# Altium PCB Flyback_SMPS.PcbDoc
Units mil, origin at the board's own origin, x right, y up, seen from the top; angles counter-clockwise.
Board outline 3149.61 x 2362.2 mil, 2 copper layers (Top Layer, Bottom Layer), stack 63 mil thick; 32 components, 20 nets, 87 pads, 17 vias.
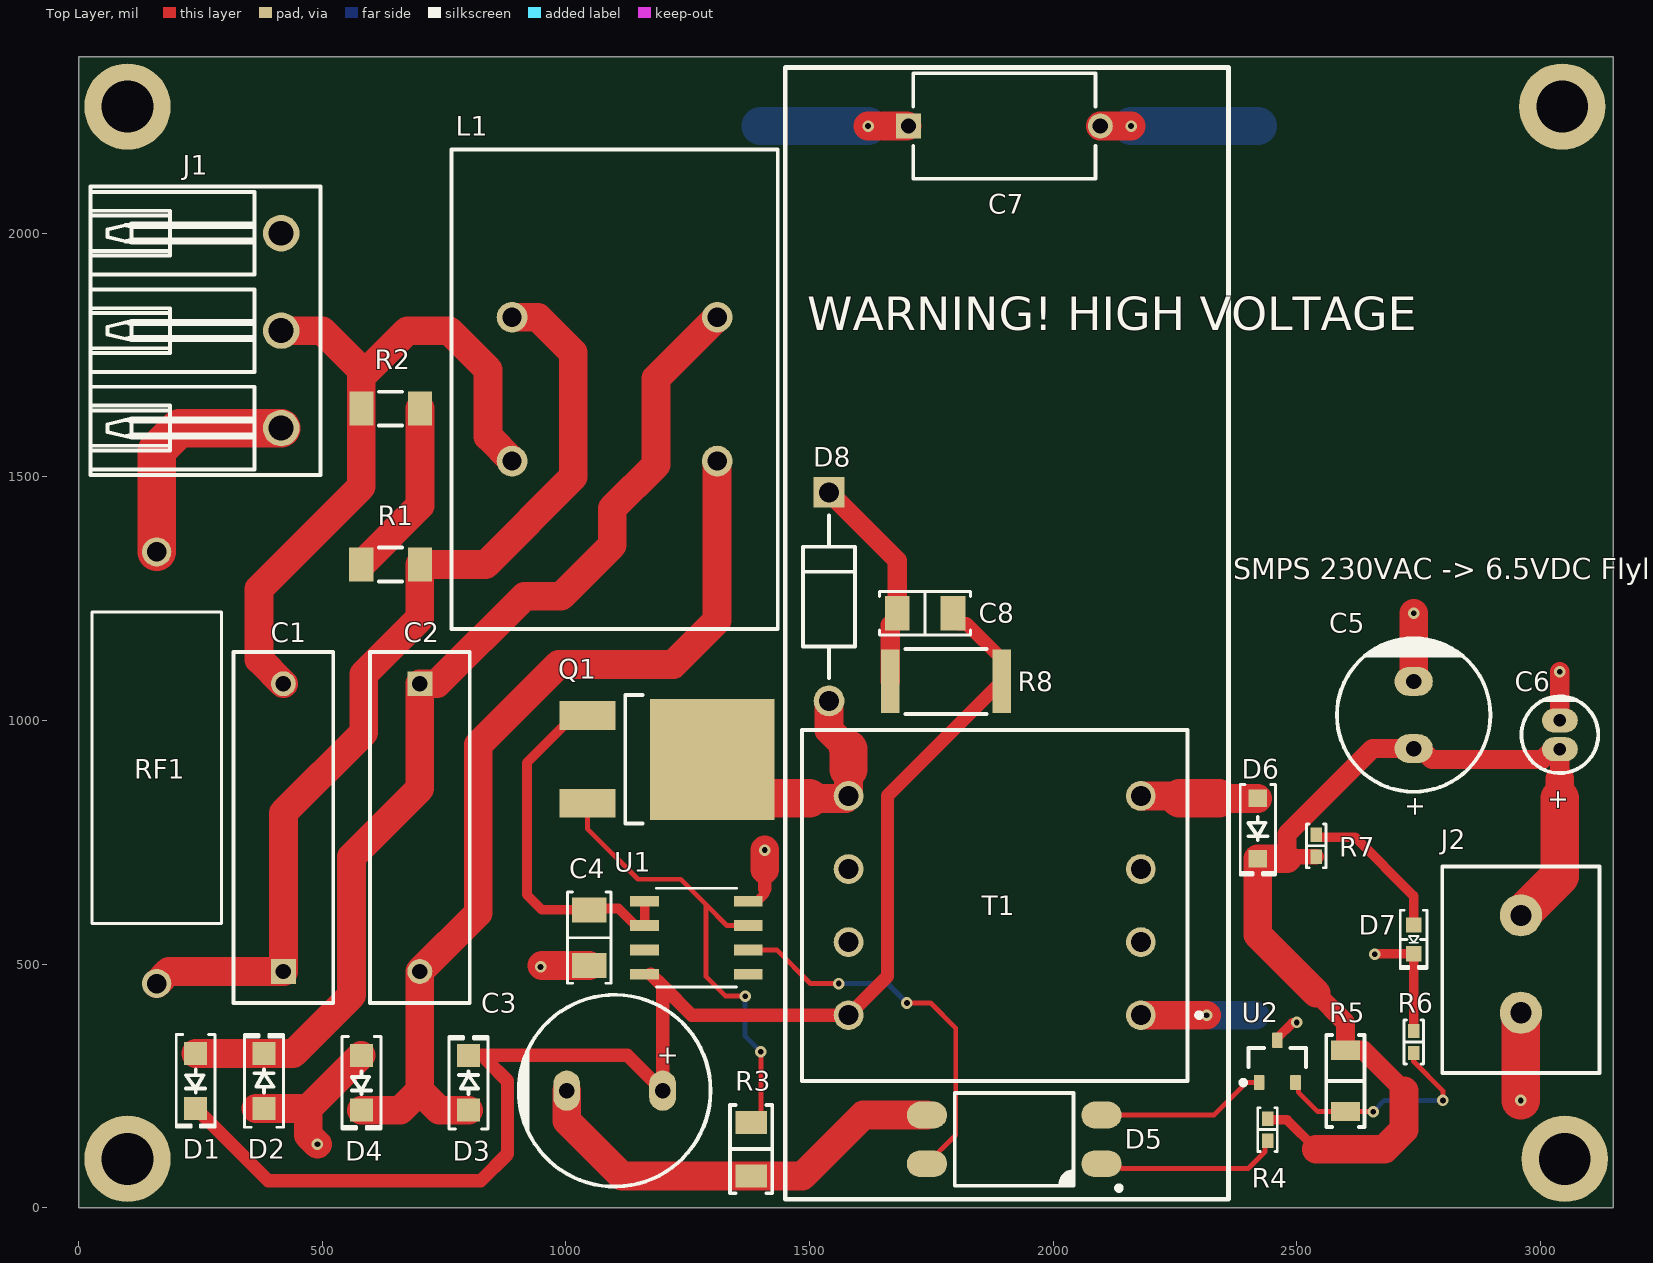
[diagram p0: Top Layer view]
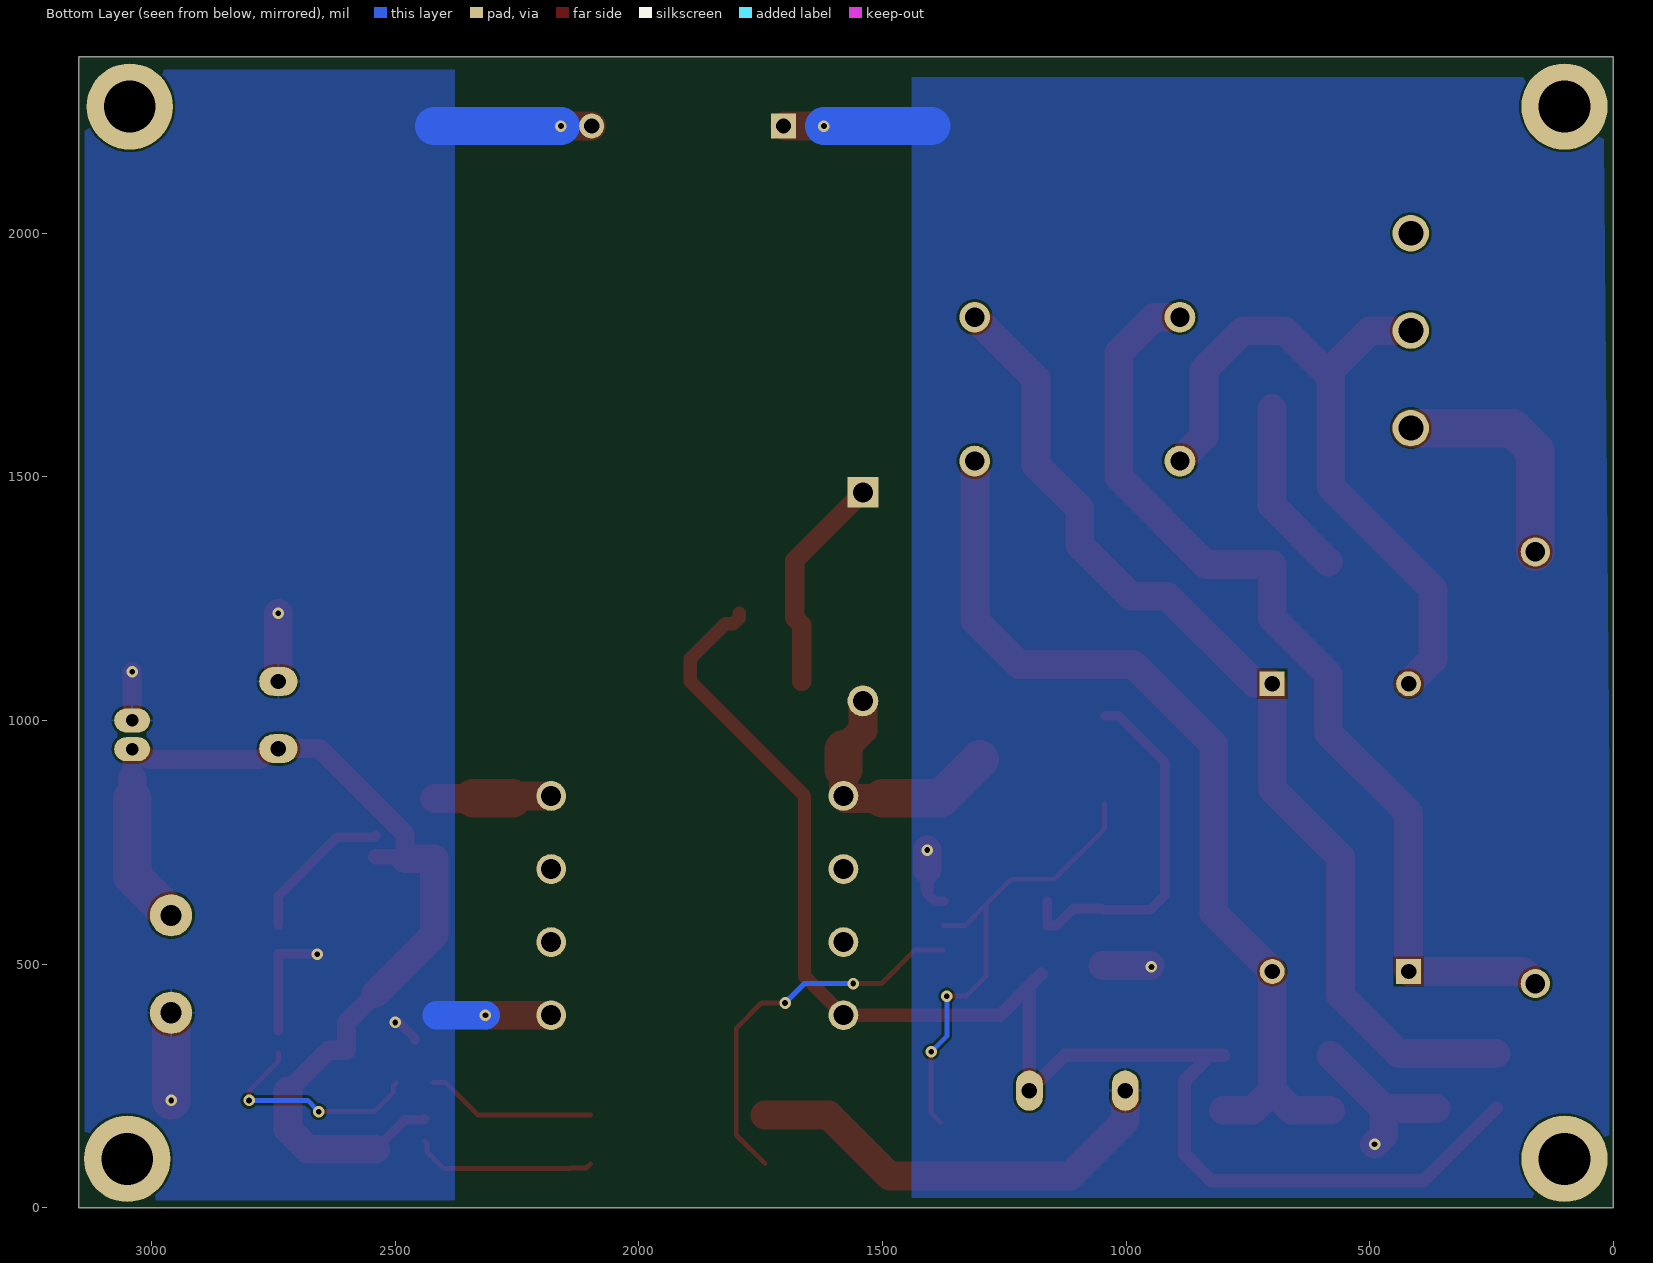
[diagram p1: Bottom Layer view, seen from below]

## Layer stack, top to bottom
Top Solder: solder mask 0.8, Solder Resist, Dk 3.5
Top Layer: signal copper 2
Dielectric 1: dielectric 59, FR-4, Dk 4.8
Bottom Layer: signal copper 2
Bottom Solder: solder mask 0.8, Solder Resist, Dk 3.5

## Board outline
0,0 0,2362.21 3149.61,2362.21 3149.61,0

## Design rules (kind name [scope] priority, off if disabled: settings)
BoardOutlineClearance [All] p1: gap=7.87 ignorepadtopadclearanceinfootprint=FALSE
Clearance Clearance_1 [All] p1: gap=5 ignorepadtopadclearanceinfootprint=TRUE except(10: Arc-Hole Track-Hole SMDPad-Hole THPad-Hole Via-Hole Fill-Hole Poly-Hole Region-Hole Text-Hole)
Clearance Clearance_Pri_to_Sec [InNetClass('PRIMARY') vs InNetClass('SECONDARY')] p2: gap=314.96 ignorepadtopadclearanceinfootprint=TRUE
ComponentClearance [All] p1: gap=5 collisioncheckmode=3 verticalgap=5 showdistances=TRUE
DiffPairsRouting [All] p1: maxlimit=10 minlimit=5 mostfreqgap=5 toplayer_minwidth=5 toplayer_maxwidth=1000 toplayer_prefwidth=5 bottomlayer_minwidth=5 bottomlayer_maxwidth=1000 bottomlayer_prefwidth=5 maxuncoupledlength=500
Height [All] p1: minheight=0 maxheight=71497.94 prefheight=500
HoleSize [All] p1: absolutevalues=TRUE maxlimit=248.03 minlimit=11.81 maxpercent=80.000 minpercent=20.000
HoleToHoleClearance [All] p1: gap=10 allowstackedmicrovias=FALSE
MinimumAnnularRing [All] p1: minimumring=5.91
MinimumSolderMaskSliver [All] p1: minsoldermaskwidth=3.94
PlaneClearance [All] p1: clearance=5
PlaneConnect PlaneConnectPowerPads [InPadClass('PowerPads')] p1: planeconnectstyle=Direct reliefexpansion=20 reliefentries=4 reliefconductorwidth=10 reliefairgap=10
PlaneConnect [All] p2: pad.planeconnectstyle=Relief pad.reliefexpansion=11.81 pad.reliefentries=4 pad.reliefconductorwidth=5 pad.reliefairgap=5 via.planeconnectstyle=Direct via.reliefexpansion=11.81 via.reliefentries=4 via.reliefconductorwidth=5 via.reliefairgap=5
PolygonConnect PolygonConnectPowerPads [All vs (InPadClass('PowerPads'))] p1: connectstyle=Direct reliefconductorwidth=10 reliefentries=4 polygonreliefangle="90 Angle" airgapwidth=10
PolygonConnect [All] p2: thpad.connectstyle=Relief thpad.reliefconductorwidth=5 thpad.reliefentries=4 thpad.polygonreliefangle="90 Angle" thpad.airgapwidth=5 smdpad.connectstyle=Relief smdpad.reliefconductorwidth=5 smdpad.reliefentries=4 smdpad.polygonreliefangle="90 Angle" smdpad.airgapwidth=5 via.connectstyle=Direct via.reliefconductorwidth=5 via.reliefentries=4 via.polygonreliefangle="90 Angle" via.airgapwidth=5
RoutingVias [All] p1: holewidth=11.81 width=23.62 viastyle="Through Hole" minholewidth=11.81 minwidth=23.62 maxholewidth=23.62 maxwidth=259.84
SilkToSilkClearance [All] p1: silktosilkclearance=5
SilkToSolderMaskClearance [IsPad] p1: minsilkscreentomaskgap=4.92 clearancetoexposedcopper=TRUE
SolderMaskExpansion [All] p1: expansion=2 istentingtop=FALSE
SupplyNets "Schematic Supply Nets_4" [InNet('GND_PRI')] p1: voltage=0.000
SupplyNets "Schematic Supply Nets_3" [InNet('N')] p2: voltage=0.000
SupplyNets "Schematic Supply Nets_2" [InNet('+6.5V')] p3: voltage=0.000
SupplyNets "Schematic Supply Nets_1" [InNet('GND_SEC')] p4: voltage=0.000
SupplyNets "Schematic Supply Nets" [InNet('L')] p5: voltage=0.000
UnRoutedNet [All] p1: checkbadconnections=TRUE
Width Width_10mil [All] p1: maxlimit=1000 minlimit=10 preferedwidth=10 minimp=50.000000 maximp=50.000000 favimp=50.000000
Width Width_6mil [All] p2: maxlimit=1000 minlimit=6 preferedwidth=6 minimp=50.000000 maximp=50.000000 favimp=50.000000
Width Power_20mil [All] p3: maxlimit=1000 minlimit=20 preferedwidth=20 minimp=50.000000 maximp=50.000000 favimp=50.000000
Width Power_12mil [All] p4: maxlimit=1000 minlimit=12 preferedwidth=12 minimp=50.000000 maximp=50.000000 favimp=50.000000
Width Width_5mil [All] p5: maxlimit=1000 minlimit=5 preferedwidth=5 minimp=50.000000 maximp=50.000000 favimp=50.000000
19 further rules are at their usual default settings.

## Components (designator, comment, footprint, x,y, rotation, side; value= is the part's Value field where it differs from the comment)
C1 "100nF X2" FP-R46KI3100JBM1K-MFG 420,780 r90 top
C2 "100nF X2" FP-R46KI3100JBM1K-MFG 700,780 r270 top
C3 "10uF 400V" "CAP TH ALUM ELEC D10.00mm S5.00mm H17.50mm" 1100,240 r0 top value=10µF
C4 "10µF" "CAP 1206_3216 - 1.8MM" 1047.82,554 r270 top
C5 "470 µF" "CAP AL TH D8 L3.5 H12.5" 2740,1011.1 r90 top
C6 "4.7µF" "CAP TH ALUM ELEC D4.00mm S1.50mm H6.00mm" 3040,970.47 r270 top
C7 "YCAP" Vishay_0_MFG 1900,2220 r0 top value=2.2nF
C8 "1500 pF" "CAP 1206_3216 - 0.8MM" 1737.09,1220 r0 top
D1 "1N4007" SOD123F 240,260 r270 top
D2 "1N4007" SOD123F 380,260 r90 top
D3 "1N4007" SOD123F 800,256.3 r90 top
D4 "1N4007" SOD123F 580,256.3 r270 top
D5 "LTV-817S-TA1" "LITEON LTV-817" 1920,140 r180 top
D6 "1N5819" SOD-123 2420,777.99 r270 top
D7 "Green" "LED 0603_1608 GREEN" 2740,550.47 r270 top
D8 "UF4007" FP-017AH-MFG 1540,1254.09 r270 top value=17pF
J1 "1146740000" SL_5_08HC_90_03 260,1800 r270 top
J2 "282837-2" "TE 282837-2" 2960,500 r270 top
L1 "744823305" WE-CMB-M 1100,1680 r270 top
Q1 "STD1NK60T4" STMicroelectronics_DPAK_TO-252_-0068772_MFG 1243.9,920 r270 top
R1 "510kΩ" FP-CR1206-IPC_A 640,1320 r0 top
R2 "510kΩ" FP-CR1206-IPC_A 640.12,1640 r0 top
R3 "2.8Ω" "RES 1206_3216" 1380,120 r90 top value="2.8 Ohms"
R4 "1kΩ" "RES 0402_1005" 2440,160 r90 top
R5 "220 Ohms" "YAGEO RES 1206_3216" 2600,260 r90 top value=3.57kΩ
R6 "2.2kΩ" "RES 0402_1005" 2740,340 r270 top
R7 "1kΩ" "RES 0402_1005" 2540,742.64 r270 top
R8 "56KΩ" FP-CRGCQ2512-IPC_C 1780,1080 r180 top
RF1 "FW30A10R0JA" FW30A10R0JA_BRN 160,1345.83 r270 top
T1 "Y8844-AL" COIL-Y8844-AL-8_V 1880,620 r180 top
U1 "NCP1200" SOIC8_ONS 1267.82,554 r180 top
U2 "TL431AQDBZRQ1" DBZ0003A_L 2460,300 r90 top

## Footprints (in the part's own frame and the unit in brackets; to place one, negate y for a bottom-side part, rotate by r counter-clockwise, add the part's x,y. Pads: shape width x height; smd on the part's side, far side on the other; paste and mask are expansions set on the pad)
"CAP 1206_3216 - 0.8MM" [mm] "Chip Capacitor, 2-Leads, Body 3.25x1.60mm, IPC Medium Density"
  rect 1.3x1.8 smd: 1(-1.45,0) 2(1.45,0)
  silkscreen extent -2.37,-1.12 2.37,1.12, body extent -1.6,-0.8 1.6,0.8, height 0.8
"CAP 1206_3216 - 1.8MM" [mm] "Chip Capacitor, 2-Leads, Body 3.25x1.60mm, IPC Medium Density"
  rect 1.3x1.8 smd: 1(-1.45,0) 2(1.45,0)
  silkscreen extent -2.37,-1.12 2.37,1.12, body extent -1.6,-0.8 1.6,0.8, height 1.8
"CAP AL TH D8 L3.5 H12.5" [mm] "8MM Diameter, 3.5MM Lead Spacing Aluminium Capacitor"
  oval 1.5x2 hole 0.8: 1(-1.75,0) 2(1.75,0)
  silkscreen extent -4,-4 4,4, body extent -4,-4 4,4, height 11.5
"CAP TH ALUM ELEC D4.00mm S1.50mm H6.00mm" [mm] "4mm Diameter 1.5mm Lead Spacing Aluminum Electrolytic Capacitors Radial, Can"
  oval 1.25x1.875 hole 0.65: 1(0.75,0) 2(-0.75,0)
  silkscreen extent -2,-2 2,2, body extent -2.01,-2 2,2, height 6
"CAP TH ALUM ELEC D10.00mm S5.00mm H17.50mm" [mm] "10mm Diameter 5mm Lead Spacing Aluminum Electrolytic Capacitors Radial, Can"
  oval 1.4x2.1 hole 0.8: 1(2.5,0) 2(-2.5,0)
  silkscreen extent -5,-5 5,5, body extent -5.01,-5 5,5, height 17.5
COIL-Y8844-AL-8_V [mm] "Hand Drawn, 8-Leads, Body 18.3x20.1mm"
  round 1.55 hole 1.05: 1(-7.62,5.715) 2(-7.62,1.905) 3(-7.62,-1.905) 4(-7.62,-5.715) 5(7.62,-5.715) 6(7.62,-1.905) 7(7.62,1.905) 8(7.62,5.715)
  silkscreen extent -10.78,-9.15 10.05,9.15, body extent -10.05,-9.15 10.05,9.15, height 14
DBZ0003A_L [mm] "SOT23, 3-Leads, Body 3.04x1.4mm, Pitch 0.95mm, IPC High Density"
  rrect18% 0.8x0.55 smd: 1(-1.1,0.95) 2(-1.1,-0.95) 3(1.1,0)
  silkscreen extent -1.22,-1.5 0.7,1.9, body extent -1.26,-1.46 1.26,1.46, height 0.96
FP-017AH-MFG [mm]
  rect 1.6x1.6 hole 1.05 paste-2539.97 mask+0: 1(-5.438,0)
  round 1.6 hole 1.05 paste-2539.97 mask+0: 2(5.438,0)
  silkscreen extent -4.24,-1.36 4.24,1.36, body extent -6.34,-1.46 6.34,1.46, height 0.25
FP-CR1206-IPC_A [mil]
  rect 49.53x69.38 smd paste+0 mask+0: 1(-60.12,0) 2(60.12,0)
  silkscreen extent -24,-35 24,35, body extent -105,-54 105,54, height 10
FP-CRGCQ2512-IPC_C [mil]
  rect 37.72x130.17 smd paste+0 mask+0: 1(-114.25,0) 2(114.25,0)
  silkscreen extent -84,-67 84,67, body extent -137,-71 137,71, height 10
FP-R46KI3100JBM1K-MFG [mm]
  rect 1.3x1.3 hole 0.8 paste-2539.97 mask+0: 1(-7.5,0)
  round 1.3 hole 0.8 paste-2539.97 mask+0: 2(7.5,0)
  silkscreen extent -9.15,-2.6 9.15,2.6, body extent -9.25,-2.7 9.25,2.7, height 0.25
FW30A10R0JA_BRN [mil]
  round 60 hole 40 paste-99999 mask+0: 1(0,0) 2(885.83,0)
  silkscreen extent 123,-133 763,133, body extent -15,-128 901,128, height 256
"LED 0603_1608 GREEN" [mm] "Chip Diode, 2-Leads, Body 1.60x0.80mm, IPC Medium Density"
  rect 0.8x0.8 smd: 1(-0.75,0) 2(0.75,0)
  silkscreen extent -1.52,-0.7 1.52,0.7, body extent -0.8,-0.4 0.8,0.4, height 0.53
"LITEON LTV-817" [mm] "SOP, 4-Leads, Body 4.60x6.50mm, Pitch 2.54mm, IPC Medium Density"
  oval 2.1x1.4 smd: 1(-4.55,1.27) 2(-4.55,-1.27) 3(4.55,-1.27) 4(4.55,1.27)
  silkscreen extent -5.59,-2.41 3.1,2.66, body extent -5.1,-2.3 5.1,2.3, height 3.85
"RES 0402_1005" [mm] "Chip Resistor, 2-Leads, Body 1.0x0.5mm, IPC Medium Density"
  rect 0.75x0.6 smd: 1(-0.575,0) 2(0.575,0)
  silkscreen extent -1.14,-0.51 1.14,0.51, body extent -0.5,-0.25 0.5,0.25, height 0.35
"RES 1206_3216" [mm] "Chip Resistor, 2-Leads, Body 3.13x1.55mm, IPC Medium Density"
  rect 1.2x1.65 smd: 1(-1.4,0) 2(1.4,0)
  silkscreen extent -2.3,-1.1 2.3,1.1, body extent -1.6,-0.8 1.6,0.8, height 0.6
SL_5_08HC_90_03 [mm] "OMNIMATE Signal - Serie BL/SL 5.08  SL 5.08HC/03/90 3.2"
  round 1.9 hole 1.3: A1(-5.08,3.95) A2(0,3.95) A3(5.08,3.95)
  silkscreen extent -7.52,-6 7.52,6, body extent -7.52,-6 7.52,6, height 8.44
SOD123F [mm] "SODFL, 2-Leads, Body 1.60x3.50mm, IPC Medium Density"
  rect 1.2x1.2 smd: 1(-1.43,0) 2(1.43,0)
  silkscreen extent -2.41,-1.02 2.41,1.02, body extent -1.75,-0.8 1.75,0.8, height 1.1
SOD-123 [mm] "SOD, 2-Leads, Body 1.55x3.70mm, IPC Medium Density"
  rect 0.9x0.95 smd: 1(-1.575,0) 2(1.575,0)
  silkscreen extent -2.3,-0.92 2.41,0.92, body extent -1.86,-0.78 1.86,0.77, height 1.35
SOIC8_ONS [mil]
  rect 59x22 smd paste+0 mask+0: 1(-106.5,75) 2(-106.5,25) 3(-106.5,-25) 4(-106.5,-75) 5(106.5,-75) 6(106.5,-25) 7(106.5,25) 8(106.5,75)
  silkscreen extent -82,-102 82,102, body extent -122,-96 122,96, height 69
STMicroelectronics_DPAK_TO-252_-0068772_MFG [mm]
  rect 1.5x2.9 smd paste+0 mask+0: 1(-2.285,-5.075) 3(2.285,-5.075)
  rect 6.3x6.5 smd paste+0 mask+0: 4(0,1.425)
  silkscreen extent -3.35,-3.1 3.35,-2.2, body extent -3.45,-6.63 3.45,4.77, height 0.25
"TE 282837-2" [mm] "Wire to Board Terminal Block Horizontal with Board, 2 Postions, Body 10.76x8.2 mm, Pitch 5.08mm"
  round 2.2 hole 1.1: 1(-2.54,0) 2(2.54,0)
  silkscreen extent -5.08,-4.1 5.68,4.1, body extent -5.08,-4.1 5.68,4.1, height 10.3
Vishay_0_MFG [mm]
  rect 1.3x1.3 hole 0.8 paste-2539.97 mask+0: 1(-5,0)
  round 1.3 hole 0.8 paste-2539.97 mask+0: 2(5,0)
  silkscreen extent -4.75,-2.75 4.75,2.75, body extent -5.75,-2.85 5.75,2.85, height 0.25
WE-CMB-M [mm] "THT Inductor, 4-Leads, Body 25.0 x 17.0 mm"
  round 1.6 hole 1: 1(-3.75,-5.35) 2(-3.75,5.35) 3(3.75,5.35) 4(3.75,-5.35)
  silkscreen extent -12.5,-8.5 12.5,8.5, body extent -11.05,-8.5 11.05,8.5, height 26.51
"YAGEO RES 1206_3216" [mm] "Chip Resistor, 2-Leads, Body 3.13x1.55mm"
  rect 1x1.5 smd: 1(-1.6,0) 2(1.6,0)
  silkscreen extent -2.4,-1 2.4,1, body extent -1.6,-0.8 1.6,0.8, height 0.6

## Part data
C1 C2: library part CMP-03022-000055-1, "CAP FILM 0.1UF 10% 560VDC RADIAL", Capacitance=100nF, Case/Package=Radial, Dielectric=PP, Max Operating Temperature=110°C, Min Operating Temperature=-40°C, Package Quantity=2000, Ratings=X2, Tolerance=10%, Voltage Rating (AC)=275V, Voltage Rating (DC)=560V, Depth=5mm, Dielectric Material=PP, Height=5mm, Height - Seated (Max)=0.433inch, Lead Diameter=0.6mm, Lead Pitch=15mm, Length=18mm, Mount="Through Hole", packaging=Bulk, RoHS Compliant=Yes, series=R46, Termination="PC Pins", Width=11mm
C3: library part 860241375002, "CAP 10 UF 20% 400 V", Capacitance=10µF, Device Package="Radial, Can", Lifetime @ Temp.="10000 Hrs @ 105°C", manufacturer="Würth Elektronik", Operating Temperature="-25°C ~ 105°C", Ripple Current @ High Frequency="274mA @ 100kHz", Ripple Current @ Low Frequency="137mA @ 120Hz", Supplier Part Number 1=732-9301-1-ND, Tolerance=±20%, Voltage - Rated=400V, Applications="General Purpose", componentlink1description=Datasheet, componentlink1url=https://katalog.we-online.de/pbs/datasheet/860241375002.pdf, componentlink2description="DigiKey Link", componentlink2url=http://digikey.com/product-detail/en/w-rth-elektronik/860241375002/732-9301-1-ND/5729239, Height - Seated (Max)="0.689\" (17.50mm)", lastupdated="9/2/2020 1:31:25 AM", Lead Spacing="0.197\" (5.00mm)", Lifecycle Status=Active, Minimum Order=1, Mounting Type="Through Hole", Package / Case="Radial, Can", packaging=TapeAndBox, Part Number=860241375002, Part Status=Active, partid=12069, Polarization=Polar, price=0.48, series=WCAP-AT1H, Size / Dimension="0.394\" Dia (10.00mm)", Supplier 1=DigiKey
C4: library part 12065D106KAT2A, "CAP CER 10UF 50V X5R 1206", Device Package="1206 (3216 Metric)", manufacturer="AVX Corporation", Operating Temperature="-55°C ~ 85°C", Supplier Part Number 1=478-9979-1-ND, Temperature Coefficient=X5R, Tolerance=±10%, Voltage - Rated=50V, Applications="General Purpose", Capacitance=10µF, componentlink1description=Datasheet, componentlink1url=http://datasheets.avx.com/cx5r.pdf, componentlink2description="DigiKey Link", componentlink2url=http://digikey.com/product-detail/en/avx-corporation/12065D106KAT2A/478-9979-1-ND/6149060, lastupdated="9/2/2020 1:05:35 AM", Lifecycle Status=Active, Minimum Order=1, Mounting Type="Surface Mount, MLCC", Package / Case="1206 (3216 Metric)", packaging=TapeAndReel, Part Number=12065D106KAT2A, Part Status=Active, partid=21345, price=0.16, series=-, Size / Dimension="0.126\" L x 0.063\" W (3.20mm x 1.60mm)", Supplier 1=DigiKey, Thickness (Max)="0.071\" (1.80mm)"
C5: library part UKW1C471MPD1TD, "CAP ALUM 470UF 20% 16V RADIAL", Device Package="Radial, Can", Lifetime @ Temp.="2000 Hrs @ 85°C", manufacturer=Nichicon, Operating Temperature="-40°C ~ 85°C", Ripple Current @ Low Frequency="420 mA @ 120 Hz", Supplier Part Number 1=493-10758-1-ND, Tolerance=±20%, Voltage - Rated="16 V", Applications=Audio, Capacitance="470 µF", componentlink1description=Datasheet, componentlink1url=http://nichicon-us.com/english/products/pdfs/e-ukw.pdf, componentlink2description="DigiKey Link", componentlink2url=https://www.digikey.com/en/products/detail/nichicon/UKW1C471MPD1TD/4317336, Height - Seated (Max)="0.492\" (12.50mm)", lastupdated="6/3/2024 8:06:12 PM", Lead Spacing="0.138\" (3.50mm)", Lifecycle Status=Active, Minimum Order=1, Mounting Type="Through Hole", Package / Case="Radial, Can", packaging=TapeAndBox, Part Number=UKW1C471MPD1TD, Part Status=Active, partid=7216, Polarization=Polar, price=0.23, series=UKW, Size / Dimension="0.315\" Dia (8.00mm)", Supplier 1=DigiKey
C6: library part UMP1C4R7MDD1TP, "CAP ALUM 4.7UF 20% 16V RADIAL", Device Package="Radial, Can", Lifetime @ Temp.="2000 Hrs @ 85°C", manufacturer=Nichicon, Operating Temperature="-40°C ~ 85°C", Ripple Current @ High Frequency="18mA @ 10kHz", Ripple Current @ Low Frequency="12mA @ 120Hz", Supplier Part Number 1=493-10248-1-ND, Tolerance=±20%, Voltage - Rated=16V, Applications="General Purpose", Capacitance=4.7µF, componentlink1description=Datasheet, componentlink1url=http://nichicon-us.com/english/products/pdfs/e-ump.pdf, componentlink2description="DigiKey Link", componentlink2url=http://digikey.com/product-detail/en/nichicon/UMP1C4R7MDD1TP/493-10248-1-ND/4312507, Height - Seated (Max)="0.236\" (6.00mm)", lastupdated="9/6/2020 1:48:30 AM", Lead Spacing="0.059\" (1.50mm)", Lifecycle Status=Active, Minimum Order=1, Mounting Type="Through Hole", Package / Case="Radial, Can", packaging=TapeAndBox, Part Number=UMP1C4R7MDD1TP, Part Status=Active, partid=23164, Polarization=Bi-Polar, price=0.11, series=UMP, Size / Dimension="0.157\" Dia (4.00mm)", Supplier 1=DigiKey
C7: library part CMP-001-00084-1, "2200 pF ±20% 500VAC Ceramic Capacitor Y5V (F) Radial, Disc", Case/Package=0, Digikey Part Number=BC3303-ND, manufacturer=Vishay, Mouser Part Number=72-VY1222M37Y5VQ63V0, Part Number=VY1222M37Y5VQ63V0, Temperature="-40°C to +125°C", Temperature Characteristic=Y5V, Temperature Range High=125°C, Temperature Range Low=-40°C, Tolerance=20%, Vac X Rating=X1, Vac Y Rating=Y1, Voltage Ac Rating X=760V, Voltage Ac Rating Y=500V, Voltage Rating=1.5kV, Automotive=No, componentlink1description=Upverter, componentlink1url=https://upverter.com/part/id/97ca20b8586b3509/, componentlink2description=Datasheet, componentlink2url=https://www.vishay.com/docs/28537/vy1series.pdf, Datasheet Path=datasheets/Cap_Vishay_VY1222M37Y5VQ63V0_eec.pdf, Digikey Description="CAP CER 2200PF 500VAC Y5V RADIAL", Height=24.5mm, helpURL=https://upverter.com/part/id/97ca20b8586b3509/, Lead Free=Yes, Material=Ceramic, Mouser Description="VY1 Ceramic Capacitor 2 2NF 20% Y5V", RoHS=TRUE, Symbol Hash=02cd4be3c70576c341d710602a673aaf100b1e689dd796f6d4934cc5521dd216, Verification Version=0.0.0.3
C8: library part C1206C152KGRACAUTO, "CAP CER 1206 1.5NF 2000V X7R 10%", Capacitance=1.5nF, Device Package="1206 (3216 Metric)", manufacturer=KEMET, Operating Temperature="-55°C ~ 125°C", Ratings=AEC-Q200, Supplier Part Number 1=399-16682-1-ND, Temperature Coefficient=X7R, Tolerance=±10%, Voltage - Rated="2000V (2kV)", Applications="Automotive, Bypass, Decoupling", componentlink1description=Datasheet, componentlink1url=https://api.kemet.com/component-edge/download/datasheet/C1206C152KGRACAUTO.pdf, componentlink2description="DigiKey Link", componentlink2url=https://www.digikey.com/en/products/detail/kemet/C1206C152KGRACAUTO/8109863, Features="Low ESL, High Voltage", lastupdated="6/4/2024 7:10:36 PM", Lifecycle Status=Active, Minimum Order=1, Mounting Type="Surface Mount, MLCC", Package / Case="1206 (3216 Metric)", packaging=TapeAndReel, Part Number=C1206C152KGRACAUTO, Part Status=Active, partid=21032, price=0.09, series="SMD Auto X7R HV", Size / Dimension="0.126\" L x 0.063\" W (3.20mm x 1.60mm)", Supplier 1=DigiKey, Thickness (Max)="0.069\" (1.75mm)"
D1 D2 D3 D4: library part 1N4007FLTR, "STANDARD RECTIFIER 1000V SOD-123", Capacitance @ Vr, F="15pF @ 4V, 1MHz", Current - Average Rectified (Io)=1A, Current - Reverse Leakage @ Vr="5µA @ 1000V", manufacturer="SMC Diode Solutions", Package / Case=SOD-123F, Supplier Device Package=SOD-123FL, Supplier Part Number 1=1655-1N4007FLCT-ND, Voltage - DC Reverse (Vr) (Max)=1000V, Voltage - Forward (Vf) (Max) @ If="1.1V @ 1A", componentlink1description=Datasheet, componentlink1url=http://www.smc-diodes.com/propdf/1N4001FL-1N4007FL%20N1646%20REV.A.pdf, componentlink2description="DigiKey Link", componentlink2url=http://digikey.com/product-detail/en/smc-diode-solutions/1N4007FLTR/1655-1N4007FLCT-ND/11657827, Diode Type=Standard, lastupdated="8/30/2020 8:59:55 PM", Lifecycle Status=Active, Minimum Order=1, Mounting Type="Surface Mount", packaging=TapeAndReel, Part Number=1N4007FLTR, partid=3314, price=0.01, Speed="Standard Recovery >500ns, > 200mA (Io)", Supplier 1=DigiKey
D5: "OPTOISOLATR 5KV TRANSISTOR 4-SMD", Current - DC Forward (If) (Max)=50mA, Current Transfer Ratio (Max)="600% @ 5mA", Current Transfer Ratio (Min)="50% @ 5mA", Device Package="4-SMD, Gull Wing", manufacturer="Lite-On Inc.", Operating Temperature="-30°C ~ 110°C", Supplier Device Package=4-SMD, Supplier Part Number 1=160-1893-1-ND, Voltage - Forward (Vf) (Typ)=1.2V, Voltage - Isolation=5000Vrms, Voltage - Output (Max)=35V, componentlink1description=Datasheet, componentlink1url=http://optoelectronics.liteon.com/upload/download/DS-70-96-0016/LTV-8X7%20series%20201610%20.pdf, componentlink2description="DigiKey Link", componentlink2url=http://digikey.com/product-detail/en/lite-on-inc/LTV-817S-TA1/160-1893-1-ND/3306757, Current - Output / Channel=50mA, Input Type=DC, lastupdated="1/12/2020 9:58:48 PM", Lifecycle Status=Active, Minimum Order=1, Mounting Type="Surface Mount", Number of Channels=1, Output Type=Transistor, Package / Case="4-SMD, Gull Wing", packaging=TapeAndReel, Part Number=LTV-817S-TA1, Part Status=Active, price=0.12, Rise / Fall Time (Typ)="4µs, 3µs", series=-, Supplier 1=DigiKey, Vce Saturation (Max)=200mV
D6: library part 1N5819HW-7-F, "DIODE SCHOTTKY 40V 1A SOD123", Capacitance @ Vr, F="60pF @ 4V, 1MHz", Current - Average Rectified (Io)=1A, Current - Reverse Leakage @ Vr="1 mA @ 40 V", manufacturer="Diodes Incorporated", Operating Temperature - Junction="-65°C ~ 125°C", Package / Case=SOD-123, Supplier Part Number 1=1N5819HW-FDICT-ND, Voltage - DC Reverse (Vr) (Max)="40 V", Voltage - Forward (Vf) (Max) @ If="450 mV @ 1 A", componentlink1description=Datasheet, componentlink1url=https://www.diodes.com/assets/Datasheets/ds30217.pdf, componentlink2description="DigiKey Link", componentlink2url=https://www.digikey.com/en/products/detail/diodes-incorporated/1N5819HW-7-F/814970, Diode Type=Schottky, lastupdated="6/3/2024 7:54:46 PM", Lifecycle Status=Active, Minimum Order=1, Mounting Type="Surface Mount", packaging=TapeAndReel, Part Number=1N5819HW-7-F, Part Status=Active, partid=2212, price=0.05, series=-, Speed="Fast Recovery =< 500ns, > 200mA (Io)", Supplier 1=DigiKey, Supplier Device Package=SOD-123
D7: library part "LT Q99G.01-R2T1-25-1", "NEXT GENERATION OF CHIP LED 0603", Current - Test=5mA, Device Package="0603 (1608 Metric)", Lens Color=Colorless, manufacturer="ams-OSRAM USA Inc.", Millicandela Rating=247.5mcd, Supplier Device Package=0603, Supplier Part Number 1=475-LTQ99G.01-R2T1-25-1CT-ND, Voltage - Forward (Vf) (Typ)=2.9V, Color=Green, componentlink2description="DigiKey Link", componentlink2url=https://www.digikey.com/en/products/detail/ams-osram-usa-inc/LT-Q99G-01-R2T1-25-1/21556499, Height (Max)=0.75mm, lastupdated="8/25/2025 8:35:06 PM", Lens Size="1.10mm x 0.80mm", Lens Style="Rectangle with Flat Top", Lens Transparency=Clear, Lifecycle Status=Active, Minimum Order=1, Mounting Type="Surface Mount", Package / Case="0603 (1608 Metric)", packaging=TapeAndReel, Part Number="LT Q99G.01-R2T1-25-1", partid=1419, price=0.03, series="Chip LED 0603", Size / Dimension="1.60mm L x 0.80mm W", Supplier 1=DigiKey, Viewing Angle=140°, Wavelength - Dominant=530nm, Wavelength - Peak=518nm
D8: library part CMP-2000-05028-2, "DIODE GEN PURP 1KV 1A DO41", Capacitance=17pF, Forward Current=1A, manufacturer="ON Semiconductor", Max Junction Temp=+150°C, Max Repetitive Reverse Voltage=1000V, Max Surge Forward Current=30A, Package=017AH, Peak Reverse Current=10uA, Temperature="-65°C to +150°C", Temperature Range Low=-65°C, Automotive=No, Category=Diode, componentlink2description=Datasheet, componentlink2url=https://www.onsemi.com/pub/Collateral/UF4007-D.pdf, Device Class L1="Discrete Semiconductors", Device Class L2=Diodes, Device Class L3="Rectifier Diodes", Digikey Description="DIODE GEN PURP 1KV 1A DO41", Footprint Url=https://www.onsemi.com/pub/Collateral/017AH.PDF, Height=2.72mm, Lead Free=Yes, Manufacturer Part Number=UF4007, Mouser Description="Rectifiers 1000V 1a Rectifier Glass Passivated", Octopart=https://octopart.com/uf4007-on+semiconductor-84331693, RoHS=TRUE, Temperature Range High=+150°C
J1: library part CMP-1559-01016-1, "OMNIMATE Signal - series BL/SL 5.08", Colour=Orange, manufacturer=Weidmueller, Rated_current_use_group_B_UL_1059="15 A", Rated_voltage_for_surge_voltage_class_pollution_degree_II_2="400 V", Rated_voltage_use_group_B_UL_1059="300 V", UL_94_flammability_rating=V-0, componentlink1description="Manufacturer URL", componentlink1url=http://www.weidmueller.com/, componentlink2description="URL Link1", componentlink2url=http://catalog.weidmueller.com/catalog/Start.do?localeId=en&ObjectID=1146740000, Contact_material=Cu-Leg, Contact_surface=tinned, Insulating_material="PA GF", Mounting_onto_the_PCB="Solder connection", No_of_poles=3, Outgoing_elbow=90°, PackageReference=SL_5_08HC_90_03, packaging=Box, PartNumber=1146740000, Pitch_inch="0.2 inch", Pitch_mm="5.08 mm", Qty="100 PCS", Revision=V1, Short_text_for_material="SL 5.08HC/03/90 3.2SN OR BX", Side_termination_characteristic="open side", Solder_pin_length_mm="3.2 mm"
J2: "TERM BLK 2P SIDE ENT 5.08MM PCB", Color=Green, Current="13.5 A", manufacturer="TE Connectivity AMP Connectors", Supplier Part Number 1=A113320-ND, Voltage="300 V", componentlink1description=Datasheet, componentlink1url=https://www.te.com/commerce/DocumentDelivery/DDEController?Action=srchrtrv&DocNm=282837&DocType=Customer+Drawing&DocLang=English, componentlink2description="DigiKey Link", componentlink2url=https://www.digikey.com/en/products/detail/te-connectivity-amp-connectors/282837-2/2187973, Features="Interlocking (Side)", lastupdated="6/21/2022 3:00:23 PM", Lifecycle Status=Active, Mating Orientation="Horizontal with Board", Minimum Order=1, Mounting Type="Through Hole", Number of Levels=1, packaging=Tray, Part Number=282837-2, Part Status=Active, Pitch="0.200\" (5.08mm)", Positions Per Level=2, price=0.31, series=Buchanan, Supplier 1=DigiKey, Wire Gauge="16-28 AWG", Wire Termination="Screw - Rising Cage Clamp"
L1: "THT Common Mode Power Line Choke WE-CMB, L = 5.00 mH", Inductance="5.00 mH", componentlink1description="Manufacturer Link", componentlink1url=http://www.we-online.com, componentlink2description=Datasheet, componentlink2url=http://www.we-online.de/katalog/media/pdf/744823305.pdf, DatasheetVersion="ver 7, Nov-2006", PackageDescription="THT Inductor, 4-Leads, Body 25.0 x 17.0 mm", PackageReference=WE-CMB-M, PackageVersion=2006, PartNumber=744823305
Q1: library part CMP-007-000000-1, "N-Channel 600V 1A (Tc) 30W (Tc) Surface Mount DPAK", Continuous Drain Current=1A, Digikey Part Number=497-2483-1-ND, Drain To Source Breakdown Voltage=600V, Drain To Source Resistance=7.3Ω, Gate To Source Voltage=30V, Input Capacitace At Vds="156pF @ 25V", manufacturer=STMicroelectronics, Max Forward Diode Voltage=1.6V, Max Junction Temp=+150°C, Mouser Part Number=511-STD1NK60, Package=DPAK(TO-252)-0068772, Power Dissipation=30W, Pulse Drain Current=4A, Temperature="-55°C to +150°C", Temperature Range High=150°C, Temperature Range Low=-55°C, Automotive=No, componentlink1description=Upverter, componentlink1url=https://upverter.com/part/id/826df9c6efb694a8/, componentlink2description=Datasheet, componentlink2url=https://www.st.com/resource/en/datasheet/std1nk60t4.pdf, Datasheet Path=datasheets/Trans_STMicroelectronics_STD1NK60T4_eec.pdf, Depletion Mode=False, Digikey Description="MOSFET N-CH 600V 1A DPAK", Drain To Source Voltage=600V, Gate Charge At Vgs="7nC @ 10V", Height=2.63mm, helpURL=https://upverter.com/part/id/826df9c6efb694a8/, Lead Free=Yes, Mouser Description="MOSFET N-Ch 600 Volt 1.0Amp Zener SuperMESH", Number of Channels=1, Number Of N Channels=1, Part Number=STD1NK60T4, Reverse Recovery Charge=240nC, Reverse Recovery Time=140ns, RoHS=TRUE, Rthja Max=100°C/W, Standoff Height=0.03mm, Symbol Hash=86656c45bbbddc162aead764a772c09aa28df33f5023c6f9e1f954939099aa0e, Technology=MOSFET, Threshold Vgs=3V, Threshold Vgs Max=3.7V, Threshold Vgs Min=2.25V, Turn Off Delay Time=19ns, Turn On Delay Time=6.5ns, Verification Version=0.0.0.3
R1 R2: library part CMP-07231-002024-1, "Thick Film Chip Resistors 1206 510kΩ 0.25W 5% 200ppm/°C", Case Code (Imperial)=1206, Case Code (Metric)=3216, Max Operating Temperature=155°C, Min Operating Temperature=-55°C, Package Quantity=5000, Power Rating=250mW, Resistance=510kR, Temperature Coefficient=200ppm/°C, Tolerance=5%, Voltage Rating=200V, Case/Package=1206, Composition="Thick Film", Contact Plating=Tin, Depth=1.6mm, Height=0.6mm, Length=3.2mm, Military Standard=Not, Mount="Surface Mount", packaging="Tape and Reel", Radiation Hardening=No, Termination=SMD/SMT, Thickness=610um, Width=1.6mm
R3: library part CPF1206B2R8E1, "CPF 1206 2R8 0.1% 25PPM 1K RL", Device Package="1206 (3216 Metric)", manufacturer="TE Connectivity Passive Product", Operating Temperature="-55°C ~ 155°C", Power (Watts)="0.125W, 1/8W", Resistance="2.8 Ohms", Supplier Device Package=1206, Supplier Part Number 1=1712-CPF1206B2R8E1CT-ND, Temperature Coefficient=±25ppm/°C, Tolerance=±0.1%, componentlink1description=Datasheet, componentlink1url=https://www.te.com/commerce/DocumentDelivery/DDEController?Action=srchrtrv&DocNm=1773200&DocType=DS&DocLang=English, componentlink2description="DigiKey Link", componentlink2url=https://www.digikey.com/en/products/detail/te-connectivity-passive-product/CPF1206B2R8E1/14006927, Composition="Thin Film", Height - Seated (Max)="0.026\" (0.65mm)", lastupdated="2/9/2024 8:53:26 PM", Lifecycle Status=Active, Minimum Order=1, Number of Terminations=2, Package / Case="1206 (3216 Metric)", packaging=TapeAndReel, Part Number=CPF1206B2R8E1, Part Status=Active, partid=58938, price=0.16, series=CPF, Size / Dimension="0.120\" L x 0.061\" W (3.05mm x 1.55mm)", Supplier 1=DigiKey
R4 R7: library part CPF0402B1K0E, "RES SMD 1K OHM 0.1% 1/16W 0402", Device Package="0402 (1005 Metric)", manufacturer="TE Connectivity Passive Product", Operating Temperature="-55°C ~ 155°C", Power (Watts)="0.063W, 1/16W", Resistance="1 kOhms", Supplier Device Package=0402, Supplier Part Number 1=A119928CT-ND, Temperature Coefficient=±25ppm/°C, Tolerance=±0.1%, componentlink1description=Datasheet, componentlink1url=https://www.te.com/commerce/DocumentDelivery/DDEController?Action=srchrtrv&DocNm=1773200&DocType=DS&DocLang=English, componentlink2description="DigiKey Link", componentlink2url=https://www.digikey.com/en/products/detail/te-connectivity-passive-product/CPF0402B1K0E/4966468, Composition="Thin Film", Height - Seated (Max)="0.014\" (0.35mm)", lastupdated="2/9/2024 8:30:24 PM", Lifecycle Status=Active, Minimum Order=1, Number of Terminations=2, Package / Case="0402 (1005 Metric)", packaging=TapeAndReel, Part Number=CPF0402B1K0E, Part Status=Active, partid=2470, price=0.10, series="CPF, Neohm", Size / Dimension="0.039\" L x 0.020\" W (1.00mm x 0.50mm)", Supplier 1=DigiKey
R5: library part RC0402FR-073K57L, "RES 3.57K OHM 1% 1/16W 0402", Device Package="0402 (1005 Metric)", manufacturer=Yageo, Operating Temperature="-55°C ~ 155°C", Power (Watts)="0.063W, 1/16W", Resistance="3.57 kOhms", Supplier Device Package=0402, Supplier Part Number 1=YAG3150CT-ND, Temperature Coefficient=±100ppm/°C, Tolerance=±1%, componentlink1description=Datasheet, componentlink1url=https://www.yageo.com/upload/media/product/productsearch/datasheet/rchip/PYu-RC_Group_51_RoHS_L_10.pdf, componentlink2description="DigiKey Link", componentlink2url=https://www.digikey.com/en/products/detail/yageo/RC0402FR-073K57L/5281010, Composition="Thick Film", Features="Moisture Resistant", Height - Seated (Max)="0.016\" (0.40mm)", lastupdated="8/31/2025 3:04:18 PM", Lifecycle Status=Active, Minimum Order=1, Number of Terminations=2, Package / Case="0402 (1005 Metric)", packaging=CutTape, Part Number=RC0402FR-073K57L, Part Status=Active, partid=2603, price=0.01, series=RC_L, Size / Dimension="0.039\" L x 0.020\" W (1.00mm x 0.50mm)", Supplier 1=DigiKey
R6: library part RR0510P-222-D, "RES SMD 2.2K OHM 0.5% 1/16W 0402", Device Package="0402 (1005 Metric)", manufacturer=Susumu, Operating Temperature="-55°C ~ 125°C", Power (Watts)="0.063W, 1/16W", Resistance="2.2 kOhms", Supplier Part Number 1=RR05P2.2KDCT-ND, Temperature Coefficient=±25ppm/°C, Tolerance=±0.5%, componentlink1description=Datasheet, componentlink1url=http://www.susumu.co.jp/common/pdf/n_catalog_partition05_en.pdf, componentlink2description="DigiKey Link", componentlink2url=https://www.digikey.com/en/products/detail/susumu/RR0510P-222-D/432405, Composition="Thin Film", Height - Seated (Max)="0.016\" (0.40mm)", lastupdated="2/9/2024 8:30:21 PM", Lifecycle Status=Active, Minimum Order=1, Number of Terminations=2, Package / Case="0402 (1005 Metric)", packaging=TapeAndReel, Part Number=RR0510P-222-D, Part Status=Active, partid=3229, price=0.01, series=RR, Size / Dimension="0.039\" L x 0.020\" W (1.00mm x 0.50mm)", Supplier 1=DigiKey
R8: library part CMP-03211-002909-1, "CRGCQ2512 56KΩ 1W ±100ppm/°C 1%200V", manufacturer="TE Connectivity", Manufacturer Part Number=CRGCQ2512F56K, Package=CRGCQ2512, Power Rating=1W, Temperature="-55°C to +155°C", Temperature Coefficient=±100ppm/°C, Temperature Range High=+155°C, Temperature Range Low=-55°C, Tolerance=0.01, Voltage Rating=200V, Automotive=Yes, Automotive Grade="Grade 0", Category=Res, componentlink2description=Datasheet, componentlink2url=https://www.te.com/commerce/DocumentDelivery/DDEController?Action=showdoc&DocId=Data+Sheet%7F1773204-3%7F1%7Fpdf%7FEnglish%7FENG_DS_1773204-3_1.pdf%7F4-2176349-1092, Composition="Thick Film", Device Class L1="Passive Components", Device Class L2=Resistors, Device Class L3="Chip SMD Resistors", Height=0.65mm, Ipc Land Pattern Name=RESC635320X55, Lead Free=Yes, Octopart=https://octopart.com/crgcq2512f56k-te+connectivity-91018602, Resistance=56KΩ, RoHS=TRUE, series=CRGCQ
RF1: "Description", Manufacturer_Name="Bourns Electronics", Copyright="Copyright (C) 2025 Ultra Librarian. All rights reserved.", Manufacturer_Part_Number=FW30A10R0JA, RefDes=RefDes, Type=Type
T1: "Flyback Transformer, 3.5 W, -40 to 85 degC, 18.3 x 20.1 x 14 mm Package", Inductance +/-10% (mH)=2.9, Leakage inductance max (uH)=26, manufacturer=Coilcraft, Operating Temperature Range="-40 to 85 degC", Application="3.5 W", componentlink1description="Manufacturer URL", componentlink1url=http://www.coilcraft.com/, componentlink2description=Datasheet, componentlink2url=http://www.coilcraft.com/pdf_viewer/showpdf.cfm?f=pdf_store:y8844.pdf, ComponentLink3Description="Package Specification", ComponentLink3URL=http://www.coilcraft.com/pdf_viewer/showpdf.cfm?f=pdf_store:y8844.pdf, DatasheetVersion=31/01/2005, DCR max (Ohms)="4.25 (8-5) 0.07 (4-1)", Isolation (Vrms)=1500, Mounting Technology="Through Hole", Output="6.5 V, 0.54 A", PackageDescription="8-Pin Through Hole Package, Body 18.3 x 20.1 mm", PackageReference=Y8844-AL-8, PartNumber=Y8844-AL
U1: library part NCP1200AD100R2, "No Description Available", Manufacturer_Name=onsemi, Copyright="Copyright (C) 2025 Ultra Librarian. All rights reserved.", Manufacturer_Part_Number=NCP1200AD100R2, RefDes=RefDes, Type=Type
U2: "Automotive Catalog Adjustable Precision Shunt Regulator, 34 ppm / degC, 100 mA, -40 to 125 degC, 3-pin SOT-23 (DBZ), Green (RoHS & no Sb/Br)", manufacturer="Texas Instruments", Rating=Automotive, Temp Coeff(Typ)(ppm/ degree C)=34, Code_JEDEC=TO-236, componentlink1description="Manufacturer URL", componentlink1url=http://www.ti.com/, componentlink2description=Datasheet, componentlink2url=http://www.ti.com/general/docs/lit/getliterature.tsp?genericPartNumber=TL431A-Q1&fileType=pdf, ComponentLink3Description="Package Specification", ComponentLink3URL=http://www.ti.com/litv/pdf/mpds108a, DatasheetVersion=SGLS302C, Eco-Plan="Green (RoHS & no Sb/Br)", Initial Accuracy @ 25/deg C(%)=1, Iout/Iz(Max)(mA)=100, Min Iz for Regulation(uA)=600, Mounting Technology="Surface Mount", PackageDescription="3-Pin Plastic Small Outline, Body 2.92 x 1.3 mm, Pitch 0.95 mm", PackageReference=DBZ0003A, PackageVersion=4203227/B, PartNumber=TL431AQDBZRQ1, SubFamily="Shunt Voltage Reference", VO Adj(Max)(V)=36, VO Adj(Min)(V)=2.495

## Free pads (board coordinates)
  round 177.17 hole 106.3: 1(100,2260) 3(100,100) 4(3045,2260) 5(3050,100)

## Via types
v1: diameter 23.62, hole 11.81, Top Layer to Bottom Layer, tented both sides, 17 vias

## Nets (pads, with @x,y where several pads share a name; then routed paths per layer and width w, separated by ;. In a path a pad name is that pad's centre, name@x,y a point inside that pad or via, vN(x,y) a via of type N, cw(c..) or ccw(c..) an arc to the next point about the centre after c; other vN are vias at no path point)
+6.5V: C5.1 C6.1 D6.2 J2.1 R4.2 R5.2 R7.2 | length 2221.9
  Top Layer w19.68: R4.2 2440,181.97 2441.97,180 2480,180 2540,120
  Top Layer w31.5: 2480,715.98 2484.02,720 R7.2
  Top Layer w39.37: 2480,715.98 2480,766.76 2655.44,942.2 2755.17,942.2 2777.37,920 3004.09,920 3025.03,940.95 C6.1 3040,880 ; 2540,440 2600,380 R5.2 2637.01,322.99 2720,240
  Top Layer w59.06: 2480,715.98 D6.2 2420,560 2540,440 ; 2540,120 2680,120 2720,160 2720,240 ; 3040,840 3040,880
  Top Layer w78.74: J2.1 3040,680 3040,840
GND_PRI: C3.2 C4.2 C7.1 D2.1 D4.1 D5.3 R3.1 U1.4 | length 1769.5
  Top Layer w19.68: U1.4 1392.82,629 1407.82,644 1407.82,654
  Top Layer w27.56: 1407.82,654 1407.82,694
  Top Layer w59.06: D2.1@363.7,203.7 D2.1 471.1,203.7 ; v1(490,130) 471.1,148.9 471.1,203.7 ; D4.1 471.1,203.7 ; v1@950.73,496.91 C4.2 ; C3.2 1001.58,178.42 1115.12,64.88 R3.1 1484.88,64.88 1610,190 D5.3 ; 1407.82,694 v1(1407.82,734) ; v1(1620,2220) C7.1@1700,2220
  Bottom Layer w78.74: 1400,2220 v1(1620,2220)
  other v1: 947.82,494
GND_SEC: C5.2 C6.2 C7.2 D7.2 J2.2 R6.1 T1.1 U2.3 | length 1274.9
  Top Layer w19.68: U2.3 2460,348.23 2491.02,379.25 2499.25,379.25 v1(2500,380) ; v1(2660,520) 2660.94,520.94 D7.2 R6.1
  Top Layer w39.37: C6.2 v1(3040,1100)
  Top Layer w59.06: C7.2 v1(2160,2220) ; T1.1 v1(2315,395) ; C5.2 v1(2740,1220)
  Top Layer w78.74: v1(2960,220) J2.2
  Bottom Layer w59.06: v1(2315,395) 2415,395
  Bottom Layer w78.74: v1(2160,2220) 2420,2220
L: J1.A3 RF1.1 | length 482.7
  Top Layer w78.74: RF1.1 160,1553.87 206.12,1600 J1.A3
N: C1.2 J1.A2 L1.4 R2.1 | length 1490.5
  Top Layer w59.06: J1.A2 500,1800 580,1720 580,1705.41 ; C1.2 370,1125.28 370,1270 580,1480 R2.1 580,1705.41 ; L1.4 889.37,1533.43 840,1582.8 840,1720 760,1800 674.59,1800 580,1705.41
NetC1_1: C1.1 L1.1 R1.2 RF1.2 | length 2021.7
  Top Layer w59.06: RF1.2 160.26,460 184.98,484.72 C1.1 420,810 585,975 585,1095 700.12,1210.12 R1.2 835,1320 1015,1500 1015,1755 942.36,1827.64 L1.1
NetC8_1: C8.1 D8.1 R8.2 | length 452.1
  Top Layer w39.37: D8.1 1680,1328.19 1680,1210.16 1665.75,1195.91 R8.2
NetD7_1: D7.1 R7.1 | length 313.6
  Top Layer w19.68: R7.1 2540,762.32 2541.97,760.35 2619.65,760.35 2740,640 D7.1
NetD8_2: D8.2 Q1.4 T1.5 | length 526.8
  Top Layer w59.06: 1500,840 1574.47,840 1579.47,845 T1.5 1580,900 ; D8.2 1540,980 1579.25,940.75
  Top Layer w78.74: Q1.4 1380,840 1500,840 ; 1579.25,940.75 1580,940 1580,900
NetR1_1: R1.1 R2.2 | length 362.7
  Top Layer w59.06: R1.1@584.64,1325.16 700.24,1440.75 R2.2
PRI_CS: Q1.3 R3.2 U1.3 | length 988
  Top Layer w10: Q1.3 1044.09,777.73 1147.82,674 1235.39,674 1287.82,621.57 ; 1330.39,579 1287.82,621.57 ; 1332.82,579 U1.3 ; v1(1367.82,434) 1327.82,434 1287.82,474 1287.82,621.57 ; R3.2 1381.38,175.12 1400,193.74 v1(1400,320)
  Bottom Layer w10: v1(1367.82,434) 1367.82,351.95 1399.77,320 v1(1400,320)
PRI_DRV: C4.1 Q1.1 U1.5 U1.6 | length 755.4
  Top Layer w19.68: Q1.1 1016.54,1009.96 920,913.43 920,641.82 950.73,611.09 C4.1 1050.73,614 1107.82,614 1142.82,579 U1.6 U1.5
PRI_FB: D5.4 U1.2 | length 795.1
  Top Layer w10: U1.2 1432.82,529 1501.82,460 v1(1560,460) ; v1(1700,420) 1748.37,420 1800,368.37 1800,149.13 D5.4
  Bottom Layer w10: v1(1560,460) 1660,460 v1(1700,420)
PRI_HV: C3.1 C8.2 D1.2 D3.2 R8.1 T1.8 U1.8 | length 3028.5
  Top Layer w27.56: D1.2 388.7,55 825,55 880,110 880,260 837.24,302.76 ; D3.2 1125.83,312.6 1179.37,259.05 1185.69,259.05 1198.43,246.32 C3.1 1198.43,454.84 ; U1.8@1174.26,479 1198.43,454.84 ; C8.2 1794.17,1210.16 1805.98,1198.35 1822.13,1198.35 1894.25,1126.22 R8.1 1660,845.75 1660,475 T1.8 1258.26,395 1198.43,454.84
PRI_L_FILT: C2.1 D1.1 D2.2 L1.2 | length 2136.6
  Top Layer w59.06: D1.1 D2.2 440,316.3 560,436.3 560,720 700,860 C2.1 735.28,1075.28 915,1255 990,1255 1095,1360 1095,1435 1185,1525 1185,1702.01 L1.2
PRI_N_FILT: C2.2 D3.1 D4.2 L1.3 | length 1936.1
  Top Layer w59.06: D4.2 660,200 700,240 ; D3.1 740,200 700,240 ; L1.3 1309.88,1531.61 1309.88,1204.88 1220,1115 985,1115 820,950 820,604.72 C2.2 700,240
SEC_A_OPTO: D5.1 R4.1 | length 378.9
  Top Layer w10: D5.1 2107.77,81.37 2139.96,81.37 2141.33,80 2400,80 2434.79,114.79 2434.79,132.15 R4.1
SEC_FB_REF: R5.1 R6.2 U2.2 | length 467.3
  Top Layer w10: U2.2 2503.23,250.87 2503.23,236.77 2542.99,197.01 R5.1 v1(2657.01,197.01) ; R6.2 2740,300 2800,240 v1(2800,220)
  Bottom Layer w10: v1(2657.01,197.01) 2680,220 v1(2800,220)
SEC_K_OPTO: D5.2 U2.1 | length 351.1
  Top Layer w10: D5.2 2330,190 2396.69,256.69 U2.1
SEC_RECT: D6.1 T1.4 | length 242.1
  Top Layer w59.06: T1.4 2180.38,844.62 2255.38,844.62 2260,840 ; 2340,840 D6.1
  Top Layer w78.74: 2260,840 2340,840
pads on no net: J1.A1 T1.2 T1.3 T1.6 T1.7 U1.1 U1.7

## Polygon pours and split planes (outlines as drawn)
GND_PRI on Bottom Layer "GND_PRI" (solid, pour order 1): 21.04,2320 1440,2320 1440,20 0.18,20
GND_SEC on Bottom Layer "GND_SEC" (solid, pour order 2): 2377.5,2335.33 3137.5,2335.33 3137.5,15.33 2377.5,15.33

## Silkscreen, mask and mechanical layers (free items; w line width, h text height)
Top Overlay:
  lines w9.84: 1449.98,17.2 2360,17.2 2360,2340 1449.98,2340 1449.98,17.2
  text "WARNING! HIGH VOLTAGE" at 1494.77,1777.96 h118.11
  text "SMPS 230VAC -> 6.5VDC Flyback" at 2370,1275 h72.83
Top 3D Body:
  the board outline again, w10

## Text inside footprints (layer, text, board x,y; h text height)
C3: Top Overlay "+" at 1186.61,295.12 h39.37
C5: Top Overlay "+" at 2760,800 h39.37 r90
C6: Top Overlay "+" at 3020,860 h39.37 r270
RF1: Mechanical 13 "RefDes2" at 135,990.41 h39.37 r270
U1: Mechanical 13 "*" at 1342.32,510.5 h39.37 r180; Mechanical 13 "RefDes2" at 1355.32,579 h39.37 r180